# Altium PCB PCB1.PcbDoc
Units mil, origin at the board's own origin, x right, y up, seen from the top; angles counter-clockwise.
Board outline 9430 x 4000 mil, 2 copper layers (Top Layer, Bottom Layer); 20 components, 104 nets, 276 pads, 0 vias.
Unrouted connection lines stored in the file: 153.
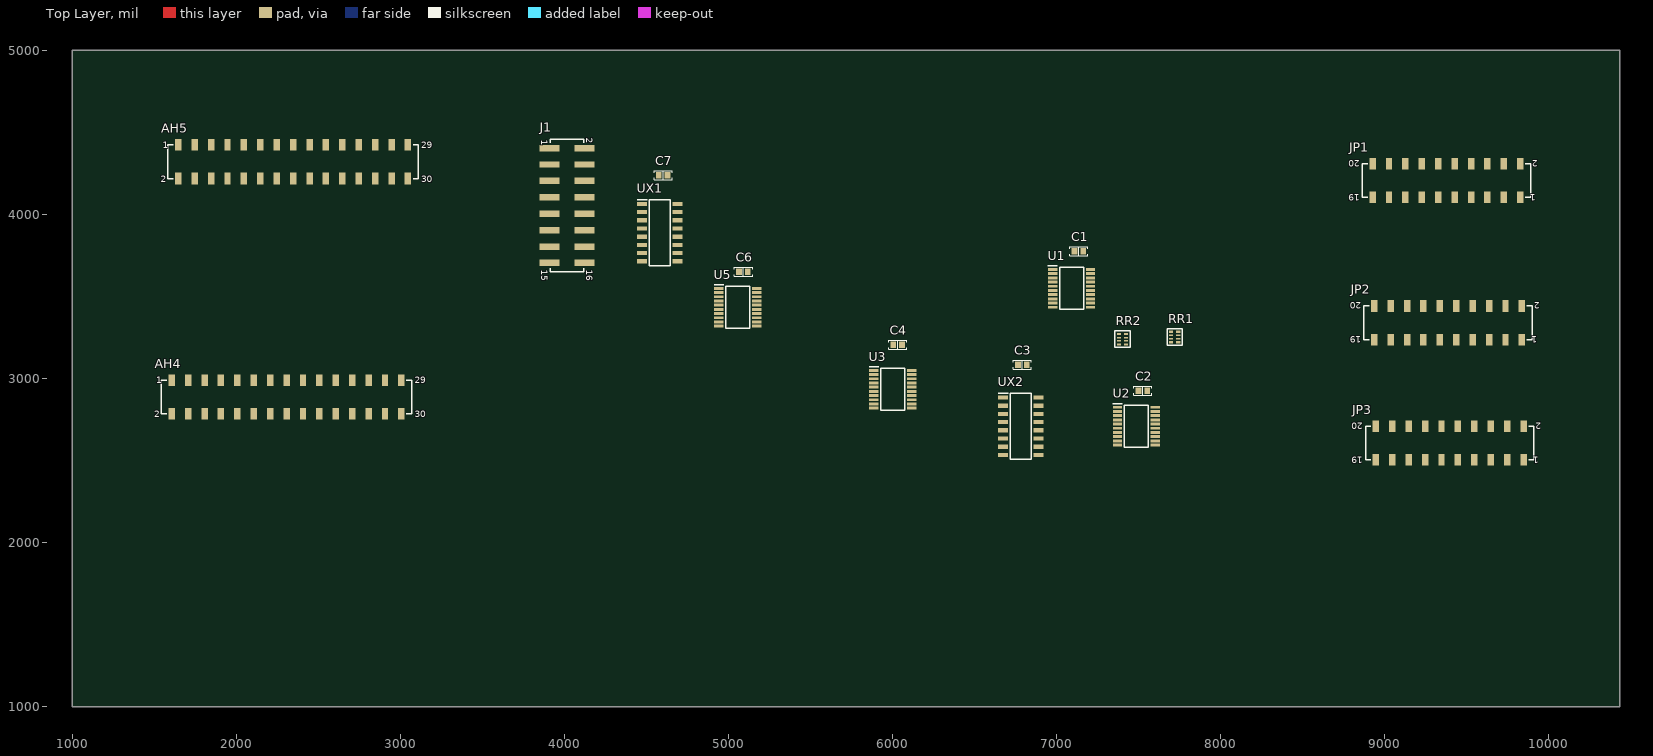
[diagram p0: Top Layer view]
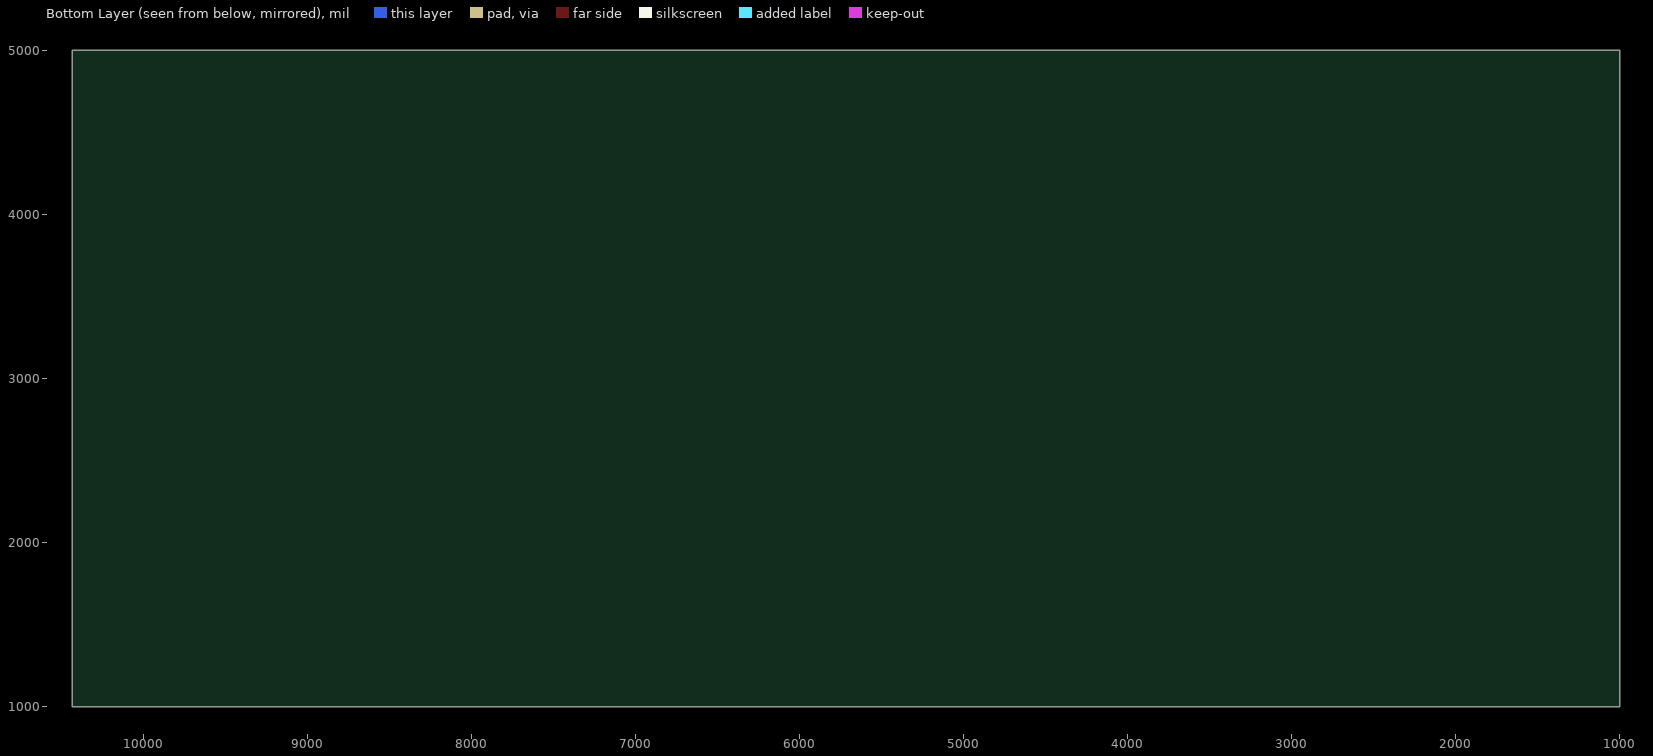
[diagram p1: Bottom Layer view, seen from below]

## Layer stack, top to bottom
Top Solder: solder mask 0.4, Solder Resist, Dk 3.5
Top Layer: signal copper 1.4
Dielectric 1: dielectric 12.6, FR-4, Dk 4.8
Bottom Layer: signal copper 1.4
Bottom Solder: solder mask 0.4, Solder Resist, Dk 3.5

## Board outline
1000,1000 10430,1000 10430,5000 1000,5000

## Design rules (kind name [scope] priority, off if disabled: settings)
Clearance [All] p1: gap=10 ignorepadtopadclearanceinfootprint=FALSE except(0: Arc-Hole Track-Hole SMDPad-Hole THPad-Hole Via-Hole Fill-Hole Poly-Hole Region-Hole Text-Hole)
PolygonConnect [All] p1: connectstyle=Relief reliefconductorwidth=10 reliefentries=4 polygonreliefangle="90 Angle" airgapwidth=10
RoutingVias [All] p1: holewidth=28 width=50 viastyle="Through Hole" minholewidth=28 minwidth=50 maxholewidth=28 maxwidth=50
SolderMaskExpansion [All] p1: expansion=4 istentingtop=FALSE
Width [All] p1: maxlimit=10 minlimit=10 preferedwidth=10
30 further rules are at their usual default settings.

## Components (designator, comment, footprint, x,y, rotation, side; value= is the part's Value field where it differs from the comment)
AH4 "61003021821" 61003021821 2305,2887.64 r0 top
AH5 "61003021821" 61003021821 2345,4322.36 r0 top
C1 "0.1 µF" "CAP 0603_1608" 7135,3775 r0 top
C2 "0.1 µF" "CAP 0603_1608" 7525,2925 r0 top
C3 "0.1 µF" "CAP 0603_1608" 6790,3085 r0 top
C4 "0.1 µF" "CAP 0603_1608" 6030,3205 r0 top
C6 "0.1 µF" "CAP 0603_1608" 5090,3650 r0 top
C7 "0.1 µF" "CAP 0603_1608" 4600,4240 r0 top
J1 "61031621121" 61031621121 4013.7,4055 r270 top
JP1 "61002021821" 61002021821 9375,4207.36 r180 top
JP2 "61002021821" 61002021821 9385,3340 r180 top
JP3 "61002021821" 61002021821 9395,2607.36 r180 top
RR1 "YC124-JR-0710KL" "RESNET 0804-8 CONVEX" 7718.35,3253.5 r0 top
RR2 "YC124-JR-0710KL" "RESNET 0804-8 CONVEX" 7400,3240 r0 top
U1 "MC74VHC245" SOP65P640X120-20N 7090,3550 r0 top
U2 "MC74VHC245" SOP65P640X120-20N 7485,2710 r0 top
U3 "MC74VHC245" SOP65P640X120-20N 6000,2935 r0 top
U5 "MC74VHC245" SOP65P640X120-20N 5055,3435 r0 top
UX1 "HEF4051BT" SOIC127P600X175-16N 4580,3890 r0 top
UX2 "HEF4051BT" SOIC127P600X175-16N 6780,2710 r0 top

## Footprints (in the part's own frame and the unit in brackets; to place one, negate y for a bottom-side part, rotate by r counter-clockwise, add the part's x,y. Pads: shape width x height; smd on the part's side, far side on the other; paste and mask are expansions set on the pad)
61002021821 [mm] "Socket Header, Pitch 2.54 mm, SMT, Vertical, dual row, 20p"
  rect 1x1.8 smd: 1(-11.43,2.6) 2(-11.43,-2.6) 3(-8.89,2.6) 4(-8.89,-2.6) 5(-6.35,2.6) 6(-6.35,-2.6) 7(-3.81,2.6) 8(-3.81,-2.6) 9(-1.27,2.6) 10(-1.27,-2.6) 11(1.27,2.6) 12(1.27,-2.6) 13(3.81,2.6) 14(3.81,-2.6) 15(6.35,2.6) 16(6.35,-2.6) 17(8.89,2.6) 18(8.89,-2.6) 19(11.43,2.6) 20(11.43,-2.6)
  silkscreen extent -13.03,-2.62 13.03,2.62, body extent -12.7,-3.35 12.7,3.35, height 8.5
61003021821 [mm] "Socket Header, Pitch 2.54 mm, SMT, Vertical, dual row, 30p"
  rect 1x1.8 smd: 1(-17.78,2.6) 2(-17.78,-2.6) 3(-15.24,2.6) 4(-15.24,-2.6) 5(-12.7,2.6) 6(-12.7,-2.6) 7(-10.16,2.6) 8(-10.16,-2.6) 9(-7.62,2.6) 10(-7.62,-2.6) 11(-5.08,2.6) 12(-5.08,-2.6) 13(-2.54,2.6) 14(-2.54,-2.6) 15(0,2.6) 16(0,-2.6) 17(2.54,2.6) 18(2.54,-2.6) 19(5.08,2.6) 20(5.08,-2.6) 21(7.62,2.6) 22(7.62,-2.6) 23(10.16,2.6) 24(10.16,-2.6) 25(12.7,2.6) 26(12.7,-2.6) 27(15.24,2.6) 28(15.24,-2.6) 29(17.78,2.6) 30(17.78,-2.6)
  silkscreen extent -19.38,-2.62 19.38,2.62, body extent -19.05,-3.35 19.05,3.35, height 8.5
61031621121 [mm] "Pin Header, pitch 2.54 mm, SMD, Vertical, dual row, 16p"
  rect 1x3.1 smd: 1(-8.89,-2.7) 2(-8.89,2.7) 3(-6.35,-2.7) 4(-6.35,2.7) 5(-3.81,-2.7) 6(-3.81,2.7) 7(-1.27,-2.7) 8(-1.27,2.7) 9(1.27,-2.7) 10(1.27,2.7) 11(3.81,-2.7) 12(3.81,2.7) 13(6.35,-2.7) 14(6.35,2.7) 15(8.89,-2.7) 16(8.89,2.7)
  silkscreen extent -10.24,-2.62 10.24,2.62, body extent -10.16,-3.75 10.16,3.75, height 9.62
"CAP 0603_1608" [mm] "Chip Capacitor, 2-Leads, Body 1.60x0.80mm, IPC Medium Density"
  rect 0.9x1 smd: 1(-0.675,0) 2(0.675,0)
  silkscreen extent -1.4,-0.7 1.4,0.7, body extent -0.8,-0.41 0.8,0.41, height 0.82
"RESNET 0804-8 CONVEX" [mm] "4 resistor 2.0x1.0mm, 0.65mm high"
  rect 0.65x0.35 smd: 1(-0.55,0.8) 4(-0.55,-0.8) 5(0.55,-0.8) 8(0.55,0.8)
  rect 0.65x0.25 smd: 2(-0.55,0.25) 3(-0.55,-0.25) 6(0.55,-0.25) 7(0.55,0.25)
  silkscreen extent -1.17,-1.28 1.17,1.28, body extent -0.53,-1.02 0.53,1.03, height 0.56
SOIC127P600X175-16N [mm]
  rect 1.55x0.65 smd: 1(-2.725,4.445) 2(-2.725,3.175) 3(-2.725,1.905) 4(-2.725,0.635) 5(-2.725,-0.635) 6(-2.725,-1.905) 7(-2.725,-3.175) 8(-2.725,-4.445) 9(2.725,-4.445) 10(2.725,-3.175) 11(2.725,-1.905) 12(2.725,-0.635) 13(2.725,0.635) 14(2.725,1.905) 15(2.725,3.175) 16(2.725,4.445)
  silkscreen extent -3.5,-5.1 1.6,5.12, body extent -3,-5.1 3,5.1, height 1.75
SOP65P640X120-20N [mm]
  rect 1.45x0.45 smd: 1(-2.925,2.925) 2(-2.925,2.275) 3(-2.925,1.625) 4(-2.925,0.975) 5(-2.925,0.325) 6(-2.925,-0.325) 7(-2.925,-0.975) 8(-2.925,-1.625) 9(-2.925,-2.275) 10(-2.925,-2.925) 11(2.925,-2.925) 12(2.925,-2.275) 13(2.925,-1.625) 14(2.925,-0.975) 15(2.925,-0.325) 16(2.925,0.325) 17(2.925,0.975) 18(2.925,1.625) 19(2.925,2.275) 20(2.925,2.925)
  silkscreen extent -3.65,-3.25 1.85,3.5, body extent -3.2,-3.25 3.2,3.25, height 1.2

## Part data
AH4 AH5: "WR-PHD Socket Header, SMT, pitch 2.54mm, Dual Row, Vertical, 30p", Contact Resistance=20mOhm, Manufacturer="Wurth Elektronik", Operating Temperature="-40 to +105degC", Rated Current=3A, Withstanding Voltage=600VAC, Working Voltage=250VAC, ComponentLink1Description=Manufacturer, ComponentLink1URL=http://www.we-online.de, ComponentLink2Description=Datasheet, ComponentLink2URL=https://www.we-online.com/catalog/datasheet/61003021821.pdf, Gender="Socket Header", Manufacturer Part Number=61003021821, Mounting Technology=SMT, Orientation=Vertical, Packaging=Tube, Pin Number=30, Pitch=2.54mm, Row Number=Dual
C1 C2 C3 C4 C6 C7: library part CC0603MRX7R8BB104, "CAP CER 0.1UF 25V X7R 0603", Device Package="0603 (1608 Metric)", Manufacturer=Yageo, Operating Temperature="-55°C ~ 125°C", Supplier Part Number 1=311-1825-1-ND, Temperature Coefficient=X7R, Tolerance=±20%, Voltage - Rated=25V, Applications="General Purpose", Capacitance="0.1 µF", ComponentLink1Description=Datasheet, ComponentLink1URL=https://www.yageo.com/upload/media/product/productsearch/datasheet/mlcc/UPY-GPHC_X7R_6.3V-to-50V_18.pdf, ComponentLink2Description="DigiKey Link", ComponentLink2URL=https://www.digikey.com/en/products/detail/yageo/CC0603MRX7R8BB104/5195232, LastUpdated="25.01.2023 20:08:27", Lifecycle Status=Active, Minimum Order=1, Mounting Type="Surface Mount, MLCC", Package / Case="0603 (1608 Metric)", Packaging=TapeAndReel, Part Number=CC0603MRX7R8BB104, Part Status=Active, PartId=9477, Price=0.01, Series=CC, Size / Dimension="0.063\" L x 0.031\" W (1.60mm x 0.80mm)", Supplier 1=DigiKey, Thickness (Max)="0.035\" (0.90mm)"
J1: "WR-PHD Pin Header, SMT, pitch 2.54mm, Dual Row, Vertical, 16p", Contact Resistance=20mOhm, Manufacturer="Wurth Elektronik", Operating Temperature="-40 to +125degC", Rated Current=3A, Withstanding Voltage=500VAC, Working Voltage=250VAC, ComponentLink1Description=Manufacturer, ComponentLink1URL=http://www.we-online.de, ComponentLink2Description=Datasheet, ComponentLink2URL=https://www.we-online.com/catalog/datasheet/61031621121.pdf, Gender="Pin Header", Manufacturer Part Number=61031621121, Mounting Technology=SMT, Orientation=Vertical, Packaging="Tape and Reel", Pin Number=16, Pitch=2.54mm, Row Number=Dual
JP1 JP2 JP3: "WR-PHD Socket Header, SMT, pitch 2.54mm, Dual Row, Vertical, 20p", Contact Resistance=20mOhm, Manufacturer="Wurth Elektronik", Operating Temperature="-40 to +105degC", Rated Current=3A, Withstanding Voltage=600VAC, Working Voltage=250VAC, ComponentLink1Description=Manufacturer, ComponentLink1URL=http://www.we-online.de, ComponentLink2Description=Datasheet, ComponentLink2URL=https://www.we-online.com/catalog/datasheet/61002021821.pdf, Gender="Socket Header", Manufacturer Part Number=61002021821, Mounting Technology=SMT, Orientation=Vertical, Packaging=Tube, Pin Number=20, Pitch=2.54mm, Row Number=Dual
RR1 RR2: "RES ARRAY 4 RES 10K OHM 0804", Manufacturer=Yageo, Number of Resistors=4, Operating Temperature="-55°C ~ 155°C", Package / Case="0804, Convex, Long Side Terminals", Power Per Element=62.5mW, Resistance (Ohms)=10k, Supplier Part Number 1=YC124J-10KCT-ND, Temperature Coefficient=±200ppm/°C, Tolerance=±5%, Applications="Automotive AEC-Q200, DDRAM, SDRAM", Circuit Type=Isolated, ComponentLink1Description=Datasheet, ComponentLink1URL=https://www.yageo.com/upload/media/product/productsearch/datasheet/rchip/PYu-YC_TC_group_51_RoHS_L_9.pdf, ComponentLink2Description="DigiKey Link", ComponentLink2URL=https://www.digikey.com/en/products/detail/yageo/YC124-JR-0710KL/1005019, Height - Seated (Max)="0.022\" (0.55mm)", LastUpdated="19.09.2022 13:54:50", Lifecycle Status=Active, Minimum Order=1, Mounting Type="Surface Mount", Number of Pins=8, Packaging=TapeAndReel, Part Number=YC124-JR-0710KL, Part Status=Active, PartId=471, Price=0.01, Series=YC124, Size / Dimension="0.079\" L x 0.039\" W (2.00mm x 1.00mm)", Supplier 1=DigiKey
U1 U2 U3 U5: library part MC74VHC245DTG, "Integrated Circuit", Manufacturer_Name=onsemi, Mouser Part Number=863-MC74VHC245DTG, Arrow Part Number=MC74VHC245DTG, Arrow Price/Stock=https://www.arrow.com/en/products/mc74vhc245dtg/on-semiconductor, Datasheet Link=https://componentsearchengine.com/Datasheets/1/MC74VHC245DTG.pdf, Height=1.2mm, Manufacturer_Part_Number=MC74VHC245DTG, Mouser Price/Stock=https://www.mouser.com/Search/Refine.aspx?Keyword=863-MC74VHC245DTG
UX1 UX2: "Integrated Circuit", Manufacturer_Name=Nexperia, Mouser Part Number=N/A, Datasheet Link=https://www.digikey.com/product-detail/en/nexperia-usa-inc/HEF4051BT-Q100118/1727-1040-1-ND/3749047, Height=1.75mm, Manufacturer_Part_Number=HEF4051BT, Mouser Price/Stock=https://www.mouser.com/Search/Refine.aspx?Keyword=N%2FA

## Nets (pads, with @x,y where several pads share a name; then routed paths per layer and width w, separated by ;. In a path a pad name is that pad's centre, name@x,y a point inside that pad or via, vN(x,y) a via of type N, cw(c..) or ccw(c..) an arc to the next point about the centre after c; other vN are vias at no path point)
A2: AH4.2
A3: AH5.2 U5.2 U5.3 U5.4
A3.1-: JP1.8 U5.18
A3.2-: JP2.8 U5.17
A3.3-: JP3.8 U5.16
B2: AH4.5
B3: AH5.3 U1.2 U1.3 U1.4
B3.1-: JP1.9 U1.18
B3.2-: JP2.9 U1.17
B3.3-: JP3.9 U1.16
B6: AH4.1
B7: AH4.12
B8: AH4.16
B9: AH4.19
B10: AH4.23
B11: AH4.26
B12: AH4.29
B13: AH5.12 JP1.3
B14: AH5.16 JP1.7
B15: AH5.19 JP2.3
B16: AH5.23 JP2.7
B17: AH5.26 JP3.3
B18: AH5.29 JP3.7
C2: AH4.3
C3: AH5.1 U5.5 U5.6 U5.7
C3.1-: JP1.10 U5.15
C3.2-: JP2.10 U5.14
C3.3-: JP3.10 U5.13
CTRL2: AH4.11
CTRL3: AH5.9 U1.5 U1.6 U1.7
CTRL3.1-: JP1.16 U1.15
CTRL3.2-: JP2.16 U1.14
CTRL3.3-: JP3.16 U1.13
D2: AH4.9
D3: AH5.7
DCLK2: AH4.6
DCLK3: AH5.6 U3.2 U3.3 U3.4
DCLK3.1-: JP1.12 U3.18
DCLK3.2-: JP2.12 U3.17
DCLK3.3-: JP3.12 U3.16
E2: AH4.8
E3: AH5.8
G7: AH4.13
G9: AH4.18
G10: AH4.22
G11: AH4.25
G12: AH4.28
G13: AH5.11 JP1.2
G14: AH5.15 JP1.6
G15: AH5.18 JP2.2
G16: AH5.22 JP2.6
G17: AH5.25 JP3.2
G18: AH5.28 JP3.6
GND: AH4.15 AH4.20 AH5.13 AH5.20 C1.2 C2.2 C3.2 C4.2 C6.2 C7.2 JP1.4 JP1.11 JP1.14 JP2.4 JP2.11 JP2.14 JP3.4 JP3.11 JP3.14 U1.10 U1.19 U2.10 U2.19 U3.10 U3.19 U5.10 U5.19 UX1.6 UX1.7 UX1.8 UX2.6 UX2.7 UX2.8
HUBVCC: AH4.30 AH5.30 C1.1 C2.1 C3.1 C4.1 C6.1 C7.1 RR1.5 RR1.6 RR1.7 RR1.8 RR2.5 RR2.6 RR2.7 RR2.8 U1.1 U1.20 U2.1 U2.20 U3.1 U3.20 U5.1 U5.20 UX1.16 UX2.16
LAT2: AH4.7
LAT3: AH5.5 U1.8 U1.9 U3.6
LAT3.1-: JP1.13 U1.12
LAT3.2-: JP2.13 U1.11
LAT3.3-: JP3.13 U3.14
OE2: AH4.4
OE3: AH5.4 U3.5 U5.8 U5.9
OE3.1-: JP1.15 U5.12
OE3.2-: JP2.15 U5.11
OE3.3-: JP3.15 U3.15
R7: AH4.10
R8: AH4.14
R9: AH4.17
R10: AH4.21
R11: AH4.24
R12: AH4.27
R13: AH5.10 JP1.1
R14: AH5.14 JP1.5
R15: AH5.17 JP2.1
R16: AH5.21 JP2.5
R17: AH5.24 JP3.1
R18: AH5.27 JP3.5
RX1.1: JP1.17 UX1.13
RX1.2: JP2.17 UX1.15
RX1.3: JP3.17 UX1.1
RX2.1: JP1.19 UX1.14
RX2.2: JP2.19 UX1.12
RX2.3: JP3.19 UX1.5
TX1.1: JP1.18 U2.18
TX1.1_: RR1.3 U2.2 UX2.13
TX1.2: JP2.18 U2.16
TX1.2_: RR1.1 U2.4 UX2.15
TX1.3: JP3.18 U2.14
TX1.3_: RR2.3 U2.6 UX2.1
TX2.1: JP1.20 U2.17
TX2.1_: RR1.2 U2.3 UX2.14
TX2.2: JP2.20 U2.15
TX2.2_: RR1.4 U2.5 UX2.12
TX2.3: JP3.20 U2.13
TX2.3_: RR2.2 U2.7 UX2.5
UX1,UX2.S1: J1.7 UX1.11 UX2.11
UX1,UX2.S2: J1.5 UX1.10 UX2.10
UX1,UX2.S3: J1.3 UX1.9 UX2.9
UX1.Y6: J1.2 UX1.2
UX1.Y7: J1.1 UX1.4
UX1.Z: J1.4 UX1.3
UX2.Y6: J1.8 UX2.2
UX2.Y7: J1.10 UX2.4
UX2.Z: J1.6 UX2.3
pads on no net: J1.9 J1.11 J1.12 J1.13 J1.14 J1.15 J1.16 RR2.1 RR2.4 U2.8 U2.9 U2.11 U2.12 U3.7 U3.8 U3.9 U3.11 U3.12 U3.13

## Text inside footprints (layer, text, board x,y; h text height)
AH4: Top Overlay "1" at 1511.3,2970.32 h40; Top Overlay "2" at 1497.52,2763.62 h40; Top Overlay "29" at 3084.92,2970.32 h40; Top Overlay "30" at 3084.92,2763.62 h40
AH5: Top Overlay "1" at 1551.3,4405.04 h40; Top Overlay "2" at 1537.52,4198.35 h40; Top Overlay "29" at 3124.92,4405.04 h40; Top Overlay "30" at 3124.92,4198.35 h40
J1: Top Overlay "2" at 4131.81,4469.17 h40 r270; Top Overlay "1" at 3856.22,4457.36 h40 r270; Top Overlay "15" at 3856.22,3664.45 h40 r270; Top Overlay "16" at 4131.81,3664.45 h40 r270
JP1: Top Overlay "20" at 8845.08,4331.38 h40 r180; Top Overlay "19" at 8845.08,4124.69 h40 r180; Top Overlay "2" at 9932.48,4331.38 h40 r180; Top Overlay "1" at 9918.7,4124.69 h40 r180
JP2: Top Overlay "20" at 8855.08,3464.02 h40 r180; Top Overlay "19" at 8855.08,3257.32 h40 r180; Top Overlay "2" at 9942.48,3464.02 h40 r180; Top Overlay "1" at 9928.7,3257.32 h40 r180
JP3: Top Overlay "20" at 8865.08,2731.38 h40 r180; Top Overlay "19" at 8865.08,2524.68 h40 r180; Top Overlay "2" at 9952.48,2731.38 h40 r180; Top Overlay "1" at 9938.7,2524.68 h40 r180